# Altium PCB PCB_Rev1.PcbDoc
Units mm, origin at the board's own origin, x right, y up, seen from the top; angles counter-clockwise.
Board outline 85.6 x 54.5 mm, 2 copper layers (Top Layer, Bottom Layer); 83 components, 68 nets, 281 pads, 4 vias.
Unrouted connection lines stored in the file: 182.
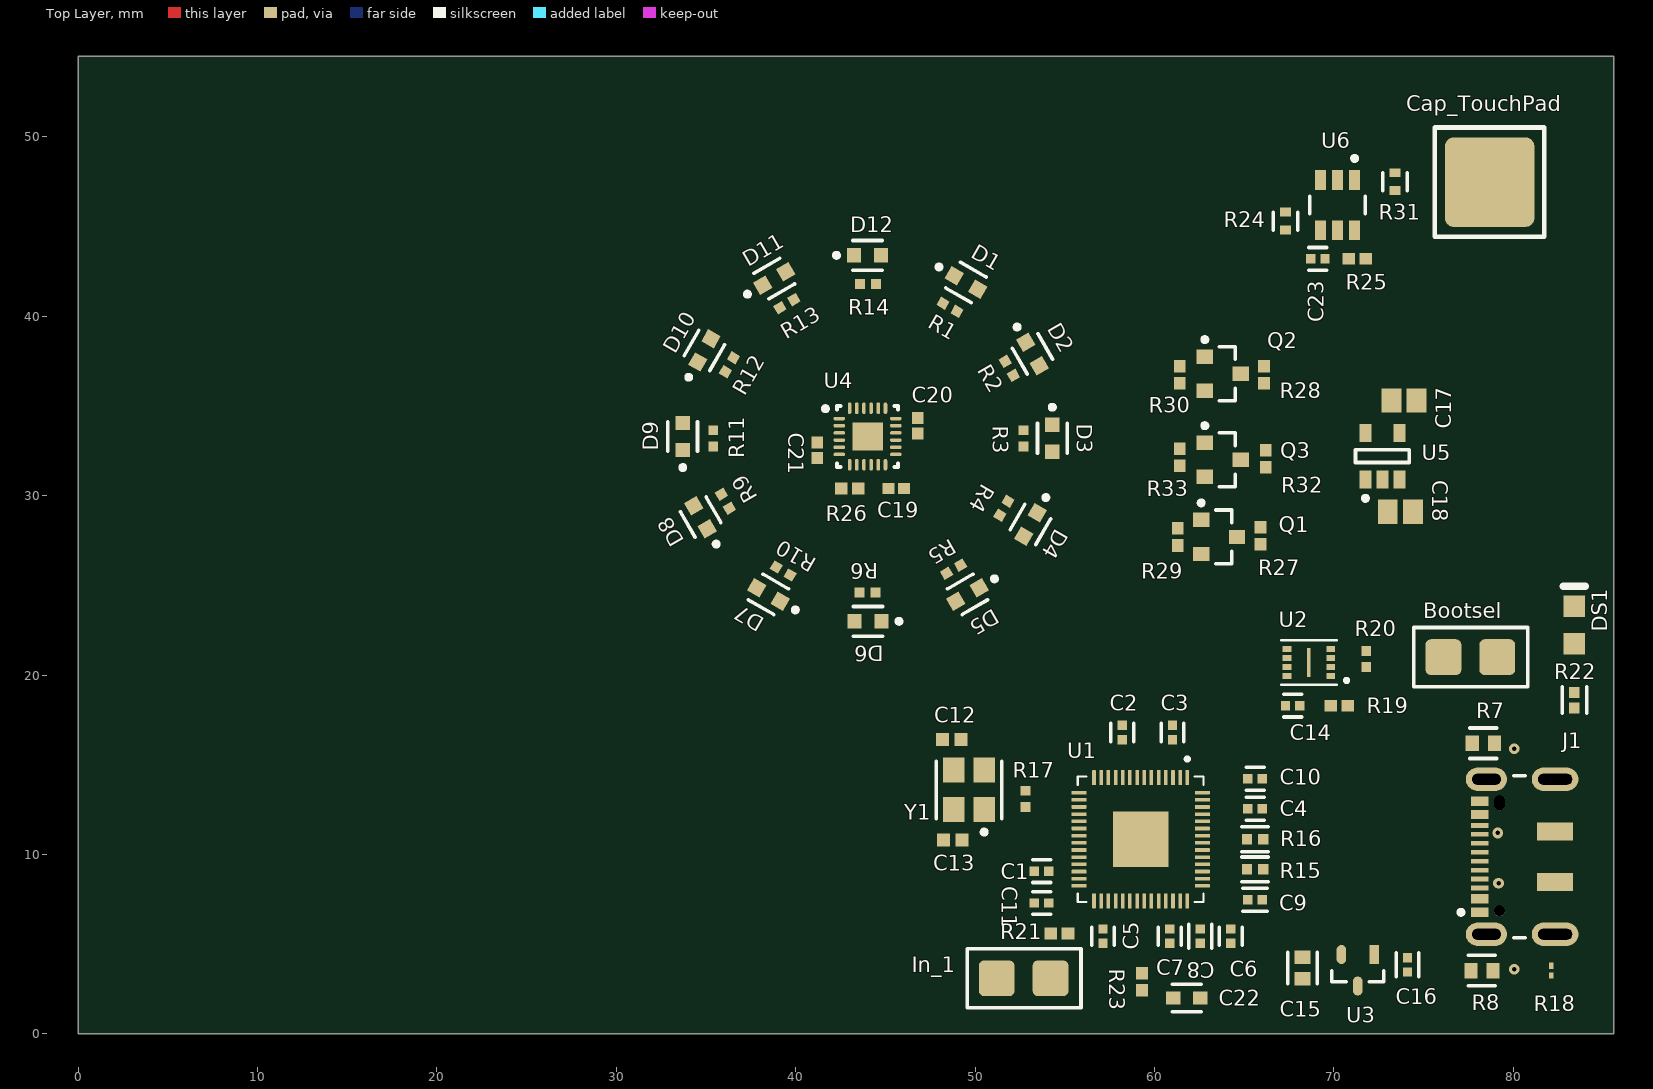
[diagram p0: Top Layer view]
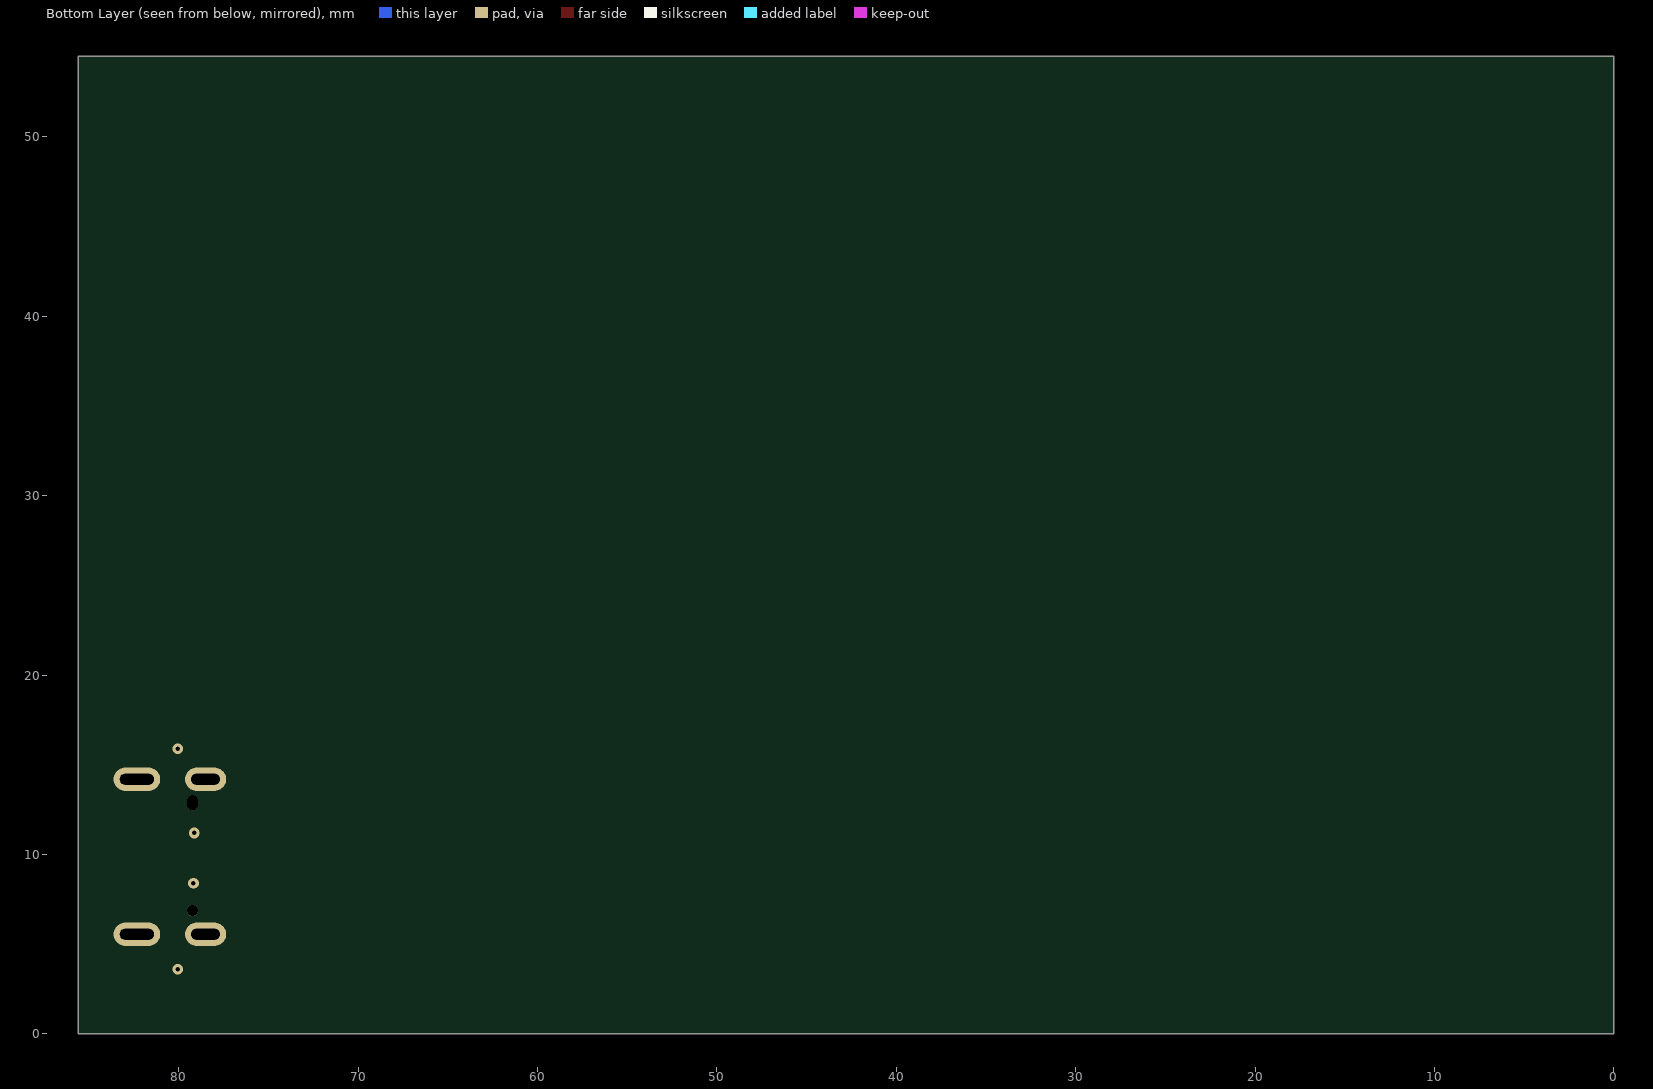
[diagram p1: Bottom Layer view, seen from below]

## Layer stack, top to bottom
Top Solder: solder mask 0.0102, Solder Resist, Dk 3.5
Top Layer: signal copper 0.0356
Dielectric 1: dielectric 0.32, FR-4, Dk 4.8
Bottom Layer: signal copper 0.0356
Bottom Solder: solder mask 0.0102, Solder Resist, Dk 3.5

## Board outline
0,0 0,54.5 85.6,54.5 85.6,0

## Design rules (kind name [scope] priority, off if disabled: settings)
Clearance [All] p1: gap=0.15 ignorepadtopadclearanceinfootprint=FALSE except(0: Arc-Hole Track-Hole SMDPad-Hole THPad-Hole Via-Hole Fill-Hole Poly-Hole Region-Hole Text-Hole)
DiffPairsRouting [All] p1: maxlimit=0.15 minlimit=0.15 mostfreqgap=0.15 toplayer_minwidth=0.1 toplayer_maxwidth=0.8 toplayer_prefwidth=0.8 bottomlayer_minwidth=0.1 bottomlayer_maxwidth=0.8 bottomlayer_prefwidth=0.8 maxuncoupledlength=12.7
PolygonConnect [All] p1: connectstyle=Relief reliefconductorwidth=0.254 reliefentries=4 polygonreliefangle="90 Angle" airgapwidth=0.254
RoutingVias [All] p1: holewidth=0.2 width=0.4 viastyle="Through Hole" minholewidth=0.2 minwidth=0.3 maxholewidth=0.6 maxwidth=6
SolderMaskExpansion [All] p1: expansion=0.102 istentingtop=FALSE
Width Width_PowerPorts [(InNet('1V1') OR InNet('1V8') OR InNet('3V3') OR InNet('5V_USB'))] p1: maxlimit=3 minlimit=0.2 preferedwidth=0.3 minimp=50.000000 maximp=50.000000 favimp=50.000000
Width [All] p2: maxlimit=3 minlimit=0.15 preferedwidth=0.18 minimp=50.000000 maximp=50.000000 favimp=50.000000
29 further rules are at their usual default settings.

## Classes and differential pairs
differential pair class 90ohm: USB_D
net class USB: USB_D_N USB_D_P
net class SPI_FLASH: QSPI_CSN QSPI_SCLK QSPI_SD0 QSPI_SD1 QSPI_SD2 QSPI_SD3
net class LEDS: LED_1 LED_2 LED_3 LED_4 LED_5 LED_6 LED_7 LED_8 LED_9 LED_10 LED_11 LED_12
net class I2C: SCL SDA
net class I2C_1V8: SCL_1V8 SDA_1V8
differential pair USB_D: +USB_D_P -USB_D_N

## Components (designator, comment, footprint, x,y, rotation, side; value= is the part's Value field where it differs from the comment)
Bootsel "2PinPad_1" 2PinPad_1 76.1,21 r0 top
C1 "100nF" FP-C0402-BB-MFG 53.7,9.075 r180 top value="0.10 μF"
C2 "100nF" FP-C0402-BB-MFG 58.2,16.8 r90 top value="0.10 μF"
C3 "100nF" FP-C0402-BB-MFG 61,16.8 r90 top value="0.10 μF"
C4 "100nF" FP-C0402-BB-MFG 65.6,12.55 r0 top value="0.10 μF"
C5 "100nF" FP-C0402-BB-MFG 57.125,5.45 r270 top value="0.10 μF"
C6 "100nF" FP-C0402-BB-MFG 64.25,5.45 r270 top value="0.10 μF"
C7 "100nF" FP-C0402-BB-MFG 60.85,5.45 r270 top value="0.10 μF"
C8 "1u" FP-C0402C105K8PACTU-MFG 62.55,5.45 r90 top
C9 "1u" FP-C0402C105K8PACTU-MFG 65.6,7.475 r0 top
C10 "100nF" FP-C0402-BB-MFG 65.6,14.225 r0 top value="0.10 μF"
C11 "100nF" FP-C0402-BB-MFG 53.7,7.3 r180 top value="0.10 μF"
C12 "10pF" CAPC1005X55X25ML05T05 48.7,16.4 r180 top
C13 "10pF" CAPC1005X55X25ML05T05 48.75,10.8 r0 top
C14 "100nF" FP-C0402-BB-MFG 67.7,18.3 r180 top value="0.10 μF"
C15 "2.2u" FP-C0603C225K4PACTU-MFG 68.25,3.675 r270 top
C16 "1u" FP-C0402C105K8PACTU-MFG 74.1,3.85 r270 top
C17 "1u" CAPC2013X140X50LL20T25 73.9,35.3 r0 top
C18 "1u" CAPC2013X140X50LL20T25 73.7,29.1 r0 top
C19 "0.1u" CAPC1005X55X30NL05T10 45.6,30.4 r180 top
C20 "0.1u" CAPC1005X55X30NL05T10 46.8,33.9 r270 top
C21 "0.1u" CAPC1005X55X30NL05T10 41.2,32.53 r270 top
C22 "100nF" FP-0603-L_1_6_0_15-W_0_81-MFG 61.8,2 r0 top
C23 "100nF" FP-C0402-BB-MFG 69.1,43.2 r180 top value="0.10 μF"
Cap_TouchPad "TouchPad" TouchPad 78.675,47.475 r90 top
D1 "LTST-C190KRKT" FP-LTST-C190KRKT-MFG 49.484,41.886 r330 top
D2 "Led_r" FP-LTST-C190KRKT-MFG 53.2,37.9 r300 top
D3 "Led_r" FP-LTST-C190KRKT-MFG 54.3,33.2 r270 top
D4 "Led_r" FP-LTST-C190KRKT-MFG 53.075,28.4 r240 top
D5 "Led_r" FP-LTST-C190KRKT-MFG 49.575,24.5 r210 top
D6 "Led_r" FP-LTST-C190KRKT-MFG 44.025,23 r180 top
D7 "LTST-C190KRKT" FP-LTST-C190KRKT-MFG 38.475,24.5 r150 top
D8 "Led_r" FP-LTST-C190KRKT-MFG 34.7,28.8 r120 top
D9 "Led_r" FP-LTST-C190KRKT-MFG 33.7,33.3 r90 top
D10 "Led_r" FP-LTST-C190KRKT-MFG 34.9,38.1 r60 top
D11 "Led_r" FP-LTST-C190KRKT-MFG 38.8,42.1 r30 top
D12 "Led_r" FP-LTST-C190KRKT-MFG 44,43.4 r0 top
DS1 "HSMG-C170" AVAG-HSMX-C170_V 83.4,22.8 r90 top
In_1 "2PinPad_1" 2PinPad_1 51.2,3.1 r0 top
J1 "DX07S016JA1R1500" FP-DX07S016JA1R1500-MFG 81.325,9.875 r90 top
Q1 "BSS138-7-F" DIOD-SOT23-3_V 63.6,27.7 r0 top
Q2 "BSS138-7-F" DIOD-SOT23-3_V 63.8,36.8 r0 top
Q3 "BSS138-7-F" DIOD-SOT23-3_V 63.8,32 r0 top
R1 "270R" RESC1005X40X25NL05T05 48.6,40.5 r330 top
R2 "270R" RESC1005X40X25NL05T05 51.9,37.1 r300 top
R3 "270R" RESC1005X40X25NL05T05 52.7,33.2 r270 top
R4 "270R" RESC1005X40X25NL05T05 51.6,29.3 r240 top
R5 "270R" RESC1005X40X25NL05T05 48.8,25.9 r210 top
R6 "270R" RESC1005X40X25NL05T05 44,24.6 r180 top
R7 "5.1K" FP-CRCW0603-e3-IPC_C 78.325,16.2 r0 top
R8 "5.1K" FP-CRCW0603-e3-IPC_C 78.25,3.525 r0 top
R9 "270R" RESC1005X40X25NL05T05 36.075,29.69 r120 top
R10 "270R" RESC1005X40X25NL05T05 39.3,25.8 r150 top
R11 "270R" RESC1005X40X25NL05T05 35.4,33.2 r90 top
R12 "270R" RESC1005X40X25NL05T05 36.3,37.3 r60 top
R13 "270R" RESC1005X40X25NL05T05 39.5,40.7 r30 top
R14 "270R" RESC1005X40X25NL05T05 44.025,41.8 r0 top
R15 "27" FP-ERJ2R-IPC_B 65.6,9.175 r180 top
R16 "27" FP-ERJ2R-IPC_B 65.6,10.85 r180 top
R17 "1k" RESC1005X40X25NL05T05 52.8,13.1 r270 top
R18 "1M" RESC0603X26X15LL03T05 82.1,3.525 r90 top
R19 "10kR" RESC1005X40X25ML05T10 70.3,18.3 r180 top
R20 "1k" RESC1005X40X25NL05T05 71.8,20.9 r90 top
R21 "10kR" RESC1005X40X25ML05T10 54.7,5.6 r0 top
R22 "330R" FP-RC1005-IPC_B 83.4,18.6 r270 top
R23 "10kR" RESC1005X40X25ML05T10 59.3,2.9 r90 top
R24 "4.7k" FP-AC0402-MFG 67.3,45.3 r90 top
R25 "10kR" RESC1005X40X25ML05T10 71.3,43.2 r180 top
R26 "10kR" RESC1005X40X25ML05T10 43,30.4 r180 top
R27 "10kR" RESC1005X40X25ML05T10 65.9,27.775 r270 top
R28 "10kR" RESC1005X40X25ML05T10 66.1,36.75 r90 top
R29 "10kR" RESC1005X40X25ML05T10 61.3,27.7 r90 top
R30 "10kR" RESC1005X40X25ML05T10 61.4,36.75 r90 top
R31 "4.7k" FP-AC0402-MFG 73.4,47.5 r90 top
R32 "10kR" RESC1005X40X25ML05T10 66.2,32.05 r90 top
R33 "10kR" RESC1005X40X25ML05T10 61.4,32.15 r90 top
U1 "RP2040" QFN40P700X700X90-57N 59.225,10.85 r270 top
U2 "W25Q16JVUXIQ_TR" PSON50P300X200X60-9N 68.6,20.7 r180 top
U3 "AP2210N-3.3TRG1" FP-SOT23-IPC_C 71.325,3.55 r270 top
U4 "ICM-20948" TDK-QFN-24_L 44,33.3 r0 top
U5 "MIC5504-1.8YM5-TR" FP-SOT23-5LD-PL-1-MFG 72.7,32.2 r90 top
U6 "MTCH101-I/OT" FP-C04-028-MFG 70.2,46.2 r270 top
Y1 "ABM8G-12.000MHZ-B4Y-T" FP-ABM8G-MFG 49.65,13.6 r90 top

## Footprints (in the part's own frame and the unit in brackets; to place one, negate y for a bottom-side part, rotate by r counter-clockwise, add the part's x,y. Pads: shape width x height; smd on the part's side, far side on the other; paste and mask are expansions set on the pad)
2PinPad_1 [mm]
  rrect30% 2x2 smd: 1(0,0) 2(3,0)
  silkscreen extent -1.65,-1.65 4.7,1.65
AVAG-HSMX-C170_V [mm] "SMD, 2-Leads, Body 2x1.25mm, Height 0.8mm"
  rect 1.2x1.2 smd: 1(-1.05,0) 2(1.05,0)
  silkscreen extent 2.15,-0.63 2.15,0.63, body extent -1,-0.63 1,0.63, height 0.8
CAPC1005X55X25ML05T05 [mm] "Chip Capacitor, 2-Leads, Body 1.00x0.50mm, IPC Low Density"
  rect 0.72x0.72 smd: 1(-0.51,0) 2(0.51,0)
  body extent -0.53,-0.28 0.53,0.27, height 0.55
CAPC1005X55X30NL05T10 [mm] "Chip Capacitor, 2-Leads, Body 1.00x0.50mm, IPC Medium Density"
  rect 0.66x0.62 smd: 1(-0.43,0) 2(0.43,0)
  body extent -0.53,-0.28 0.53,0.27, height 0.55
CAPC2013X140X50LL20T25 [mm] "Chip Capacitor, 2-Leads, Body 2.00x1.25mm, IPC High Density"
  rect 1.1x1.35 smd: 1(-0.7,0) 2(0.7,0)
  body extent -1.1,-0.72 1.1,0.72, height 1.4
DIOD-SOT23-3_V [mm] "SOT23, 3-Leads, Body 3x1.4mm, Pitch 0.95mm"
  rect 0.9x0.8 smd: 1(-1,0.95) 2(-1,-0.95) 3(1,0)
  silkscreen extent -1.12,-1.5 0.7,2.02, body extent -1.25,-1.5 1.25,1.5, height 1.1
FP-0603-L_1_6_0_15-W_0_81-MFG [mm]
  rect 0.8x0.75 smd paste+0 mask+0: 1(-0.75,0) 2(0.75,0)
  silkscreen extent -0.8,-0.77 0.8,0.77, body extent -1.25,-0.58 1.25,0.58, height 0.25
FP-ABM8G-MFG [mm]
  rect 1.4x1.2 smd paste+0 mask+0: 1(-1.1,-0.85) 2(1.1,-0.85) 3(1.1,0.85) 4(-1.1,0.85)
  silkscreen extent -2.47,-1.83 1.6,1.83, body extent -1.9,-1.55 1.9,1.55, height 0.25
FP-AC0402-MFG [mm]
  rect 0.5x0.6 smd paste+0 mask+0: 1(-0.5,0) 2(0.5,0)
  silkscreen extent -0.5,-0.67 0.5,0.67, body extent -0.85,-0.4 0.85,0.4, height 0.25
FP-C04-028-MFG [mm]
  rect 1.1x0.6 smd paste+0 mask+0: 1(-1.4,0.95) 2(-1.4,0) 3(-1.4,-0.95) 4(1.4,-0.95) 5(1.4,0) 6(1.4,0.95)
  silkscreen extent -2.72,-1.55 0.48,1.55, body extent -2.05,-1.78 2.05,1.78, height 0.25
FP-C0402-BB-MFG [mm]
  rect 0.52x0.52 smd paste+0 mask+0: 1(-0.4,0) 2(0.4,0)
  silkscreen extent -0.5,-0.64 0.5,0.64, body extent -0.8,-0.4 0.8,0.4, height 0.25
FP-C0402C105K8PACTU-MFG [mm]
  rect 0.52x0.52 smd paste+0 mask+0: 1(-0.4,0) 2(0.4,0)
  silkscreen extent -0.67,-0.64 0.67,0.64, body extent -0.8,-0.4 0.8,0.4, height 0.25
FP-C0603C225K4PACTU-MFG [mm]
  rect 0.75x0.9 smd paste+0 mask+0: 1(-0.6,0) 2(0.6,0)
  silkscreen extent -0.87,-0.82 0.87,0.82, body extent -1.2,-0.6 1.2,0.6, height 0.25
FP-CRCW0603-e3-IPC_C [mm]
  rect 0.735x0.862 smd paste+0 mask+0: 1(-0.615,0) 2(0.615,0)
  silkscreen extent -0.75,-0.85 0.75,0.85, body extent -1.08,-0.58 1.08,0.58, height 0.25
FP-DX07S016JA1R1500-MFG [mm]
  rrect100% 1.3x2.3 hole 1.6 slot 0.6 at 0 deg paste-1000 mask+0: 1(-4.32,2.825) 2(4.32,2.825)
  rrect100% 1.3x2.6 hole 1.9 slot 0.6 at 0 deg paste-1000 mask+0: 3(-4.32,-1) 6(4.32,-1)
  rect 1x2 smd paste+0 mask+0: 4(-1.4,-1) 5(1.4,-1)
  rect 0.52x1 smd paste+0 mask+0: A1/B12(-3.1,3.2) A4/B9(-2.35,3.2) A12/B1(3.1,3.2) B4/A9(2.35,3.2)
  rect 0.27x1 smd paste+0 mask+0: A5(-1.75,3.2) A6(-0.25,3.2) A7(0.75,3.2) A8(1.75,3.2) B5(1.25,3.2) B6(0.25,3.2) B7(-0.75,3.2) B8(-1.25,3.2)
  round 0.6 hole 0.6 unplated paste-1000 mask+0: ""(-3,2.1)
  rrect100% 0.85x0.6 hole 0.6 slot 0.85 at 0 deg unplated paste-1000 mask+0: ""(3,2.1)
  silkscreen extent -4.52,0.67 4.52,4.37, body extent -5.07,-3.75 5.07,4.08, height 0.25
FP-ERJ2R-IPC_B [mm]
  rect 0.568x0.572 smd paste+0 mask+0: 1(-0.452,0) 2(0.452,0)
  silkscreen extent -0.74,-0.69 0.74,0.69, body extent -0.89,-0.44 0.89,0.44, height 0.25
FP-LTST-C190KRKT-MFG [mm]
  rect 0.8x0.8 smd paste+0 mask+0: 1(-0.75,0) 2(0.75,0)
  silkscreen extent -1.85,-0.82 0.82,0.82, body extent -1.25,-0.55 1.25,0.55, height 0.25
FP-RC1005-IPC_B [mm]
  rect 0.615x0.572 smd paste+0 mask+0: 1(-0.429,0) 2(0.429,0)
  silkscreen extent -0.74,-0.69 0.74,0.69, body extent -0.89,-0.44 0.89,0.44, height 0.25
FP-SOT23-5LD-PL-1-MFG [mm]
  rect 1x0.66 smd paste+0 mask+0: 1(-1.3,0.95) 2(-1.3,0) 3(-1.3,-0.95) 4(1.3,-0.95) 5(1.3,0.95)
  silkscreen extent -2.47,-1.5 0.35,1.5, body extent -1.9,-1.6 1.9,1.6, height 0.25
FP-SOT23-IPC_C [mm]
  rect 1.059x0.547 smd paste+0 mask+0: 1(-0.877,0.915)
  rrect100% 1.059x0.547 smd paste+0 mask+0: 2(-0.877,-0.915) 3(0.877,0)
  silkscreen extent 0.03,-1.45 0.65,1.45, body extent -1.51,-1.55 1.51,1.55, height 0.25
PSON50P300X200X60-9N [mm]
  rect 0.49x0.35 smd: 1(-1.22,0.75) 2(-1.22,0.25) 3(-1.22,-0.25) 4(-1.22,-0.75) 5(1.22,-0.75) 6(1.22,-0.25) 7(1.22,0.25) 8(1.22,0.75)
  rect 0.2x1.6 smd: 9(0,0)
  silkscreen extent -2.2,-1.24 1.55,1.24, body extent -1.5,-1 1.5,1, height 0.6
QFN40P700X700X90-57N [mm]
  rrect25% 0.84x0.2 smd: 1(-3.435,2.6) 2(-3.435,2.2) 3(-3.435,1.8) 4(-3.435,1.4) 5(-3.435,1) 6(-3.435,0.6) 7(-3.435,0.2) 8(-3.435,-0.2) 9(-3.435,-0.6) 10(-3.435,-1) 11(-3.435,-1.4) 12(-3.435,-1.8) 13(-3.435,-2.2) 14(-3.435,-2.6) 29(3.435,-2.6) 30(3.435,-2.2) 31(3.435,-1.8) 32(3.435,-1.4) 33(3.435,-1) 34(3.435,-0.6) 35(3.435,-0.2) 36(3.435,0.2) 37(3.435,0.6) 38(3.435,1) 39(3.435,1.4) 40(3.435,1.8) 41(3.435,2.2) 42(3.435,2.6)
  rrect25% 0.2x0.84 smd: 15(-2.6,-3.435) 16(-2.2,-3.435) 17(-1.8,-3.435) 18(-1.4,-3.435) 19(-1,-3.435) 20(-0.6,-3.435) 21(-0.2,-3.435) 22(0.2,-3.435) 23(0.6,-3.435) 24(1,-3.435) 25(1.4,-3.435) 26(1.8,-3.435) 27(2.2,-3.435) 28(2.6,-3.435) 43(2.6,3.435) 44(2.2,3.435) 45(1.8,3.435) 46(1.4,3.435) 47(1,3.435) 48(0.6,3.435) 49(0.2,3.435) 50(-0.2,3.435) 51(-0.6,3.435) 52(-1,3.435) 53(-1.4,3.435) 54(-1.8,3.435) 55(-2.2,3.435) 56(-2.6,3.435)
  rect 3.1x3.1 smd paste-0.57: 57(0,0)
  silkscreen extent -4.57,-3.5 3.5,3.5, body extent -3.5,-3.5 3.5,3.5, height 0.9
RESC0603X26X15LL03T05 [mm] "Chip Resistor, 2-Leads, Body 0.60x0.30mm, IPC High Density"
  rect 0.35x0.25 smd: 1(-0.275,0) 2(0.275,0)
  body extent -0.32,-0.16 0.31,0.17, height 0.26
RESC1005X40X25ML05T10 [mm] "Chip Resistor, 2-Leads, Body 1.00x0.50mm, IPC Low Density"
  rect 0.7x0.65 smd: 1(-0.475,0) 2(0.475,0)
  body extent -0.53,-0.27 0.53,0.28, height 0.4
RESC1005X40X25NL05T05 [mm] "Chip Resistor, 2-Leads, Body 1.00x0.50mm, IPC Medium Density"
  rect 0.55x0.55 smd: 1(-0.45,0) 2(0.45,0)
  body extent -0.53,-0.27 0.52,0.28, height 0.4
TDK-QFN-24_L [mm] "QFN, 24-Leads, Body 3.10x3.10mm, Pitch 0.40mm, Thermal Pad 1.70x1.54mm, IPC High Density"
  oval 0.65x0.2 smd: 1(-1.575,1) 2(-1.575,0.6) 3(-1.575,0.2) 4(-1.575,-0.2) 5(-1.575,-0.6) 6(-1.575,-1) 13(1.575,-1) 14(1.575,-0.6) 15(1.575,-0.2) 16(1.575,0.2) 17(1.575,0.6) 18(1.575,1)
  oval 0.2x0.65 smd: 7(-1,-1.575) 8(-0.6,-1.575) 9(-0.2,-1.575) 10(0.2,-1.575) 11(0.6,-1.575) 12(1,-1.575) 19(1,1.575) 20(0.6,1.575) 21(0.2,1.575) 22(-0.2,1.575) 23(-0.6,1.575) 24(-1,1.575)
  rect 1.7x1.54 smd: 25(0,0)
  silkscreen extent -2.47,-1.7 1.7,1.7, body extent -1.55,-1.55 1.55,1.55, height 1.05
TouchPad [mm]
  rrect20% 5x5 smd: 1(0,0)
  silkscreen extent -3.05,-3.05 3.05,3.05

## Part data
C1 C2 C3 C4 C5 C6 C7 C10 C11 C14 C23: library part CMP-2008-02108-2, "CAP CER 0.1UF 16V X7R 0402", Capacitance="0.10 μF", Manufacturer=Kemet, Manufacturer Part Number=C0402C104K4RACTU, Package=C0402-BB, Temperature="-55°C to +125°C", Temperature Characteristic=X7R, Temperature Coefficient=15%, Temperature Range High=+125°C, Temperature Range Low=-55°C, Tolerance=0.1, Voltage Rating="16 V", Automotive=No, Category=Cap, ComponentLink2Description=Datasheet, ComponentLink2URL=https://content.kemet.com/datasheets/KEM_C1002_X7R_SMD.pdf, Device Class L1="Passive Components", Device Class L2=Capacitors, Device Class L3="Ceramic Capacitors", Digikey Description="CAP CER 0.1UF 16V X7R 0402", Height=0.55mm, Ipc Land Pattern Name=CAPC10050X50, Lead Free=Yes, Material=Ceramic, Mouser Description="Cap Ceramic 0.1uF 16V X7R 10% SMD 0402 125?C Paper T/R - Tape and Reel (Alt: C0402C104K4RAC TU)", Octopart=https://octopart.com/c0402c104k4ractu-kemet-94158, RoHS=TRUE
C8 C9 C16: library part CMP-2008-02081-2, "CAP CER 1UF 10V X5R 0402", Capacitance=1uF, Case Code (Imperial)=0402, Case Code (Metric)=1005, Dielectric=X5R, Dielectric Material=Ceramic, Max Operating Temperature=85°C, Min Operating Temperature=-55°C, Package Quantity=1, Tolerance=10%, Voltage=10V, Case/Package=0402, Construction=Flat, Contact Plating=Tin, Depth=0.5mm, Dissipation Factor=5%, Height=0.5mm, Lead Free="Lead Free", Length=1mm, Mount="Surface Mount", Number of Pins=2, Packaging="Tape and Reel", Radiation Hardening=No, REACH SVHC="No SVHC", RoHS Compliant=Yes, Series=C, Termination=SMD/SMT, Thickness=0.022inch, Voltage Rating=10V, Voltage Rating (DC)=10V, Width=0.5mm
C12 C13: library part CMP-2100-03589-1, "Chip Capacitor, 10 pF, +/- 5%, 50 V, -55 to 125 degC, 0402 (1005 Metric), RoHS, Tape and Reel", Case Code (Imperial)=0402, Case Code (Metric)=1005, Dielectric=C0G, Dielectric Material=Ceramic, Insulation Resistance=100GR, Manufacturer=Yageo, Max Operating Temperature=125degC, Min Operating Temperature=-55degC, Package Description="2-Pin Surface Mount Device, Body 1 x 0.5 mm", Package Quantity=1, Temperature Coefficient=30ppm/degC, Tolerance=5%, Voltage=50V, Capacitance=10pF, Case/Package=0402, Composition=Ceramic, Datasheet URL=http://www.yageo.com/documents/recent/UPY-GP_NP0_16V-to-50V_14.pdf, Datasheet Version="Rev. 14, 07/2016", Depth=0.5mm, Height=0.5mm, Lead Free=LeadFree, Length=1mm, Manufacturer URL=http://www.yageo.com/, Mount=SurfaceMount, Number of Pins=2, Package Reference=0402, Packaging=TapeandReel, Radiation Hardening=No, REACH SVHC=NoSVHC, RoHSCompliant=True, Termination=SMD/SMT, Thickness=0.022inch, Voltage Rating=50V, Voltage Rating (DC)=50V, Width=0.02inch
C15: library part CMP-2006-02259-2, "CAP CER 2.2UF 16V X5R 0603", Capacitance=2.2uF, Case Code (Imperial)=0603, Case Code (Metric)=1608, Dielectric=X5R, Dielectric Material=Ceramic, Max Operating Temperature=85°C, Min Operating Temperature=-55°C, Package Quantity=1, Tolerance=10%, Voltage=16V, Case/Package=0603, Construction=Flat, Contact Plating=Tin, Depth=0.8mm, Dissipation Factor=5%, Height=0.8mm, Lead Free="Lead Free", Length=1.6mm, Mount="Surface Mount", Number of Pins=2, Packaging="Tape and Reel", Radiation Hardening=No, REACH SVHC="No SVHC", RoHS Compliant=Yes, Series=C, Termination=SMD/SMT, Thickness=0.034inch, Voltage Rating=16V, Voltage Rating (DC)=16V, Width=0.8mm
C17 C18: library part CMP-1036-04737-2, Manufacturer=Kemet, Part Number=C0805C105J8RACTU
C19 C20 C21: library part CMP-2008-03087-1, Manufacturer=Kemet, Part Number=C0402C104K9RACTU
C22: library part CMP-2006-02049-2, "General Purpose Ceramic Capacitor, 0603, 100nF, 5%, X7R, 15%, 50V", Case Code (Imperial)=0603, Case Code (Metric)=1608, Dielectric=X7R, Dielectric Material=Ceramic, Max Operating Temperature=125°C, Min Operating Temperature=-55°C, Package Quantity=1, Tolerance=5%, Voltage=50V, Capacitance=100nF, Case/Package=0603, Construction=Flat, Contact Plating=Tin, Depth=0.81mm, Height=0.9mm, Lead Free="Lead Free", Length=1.6mm, Mount="Surface Mount", Number of Pins=2, Packaging="Tape and Reel", Radiation Hardening=No, REACH SVHC="No SVHC", RoHS Compliant=Yes, Series=-, Termination=SMD/SMT, Thickness=0.035inch, Voltage Rating=50V, Voltage Rating (DC)=50V, Width=0.032inch
D1 D2 D3 D4 D5 D6 D7 D8 D9 D10 D11 D12: library part CMP-1674-00011-2, "LED RED CLEAR CHIP SMD", Case Code (Imperial)=0603, Case Code (Metric)=1608, Color=Red, Forward Current=30mA, Forward Voltage=2.4V, Lens Color=Colorless, Max Operating Temperature=85°C, Min Operating Temperature=-55°C, Package Quantity=1, Power Dissipation=75mW, Reverse Voltage=5V, Test Current=20mA, Case/Package=0603, Depth=0.8mm, Dominant Wavelength=631nm, Height=0.8mm, Illumination Color=Red, Lead Free="Lead Free", Length=1.6mm, Lens Style=Diffused, Lens Transparency=Clear, Luminous Intensity=54mcd, Mount="Surface Mount", Number of Elements=1, Number of LEDs=1, Number of Pins=2, Packaging="Tape and Reel", Power Rating=75mW, Radiation Hardening=No, Viewing Angle=130°, Wavelength=639nm, Width=0.8mm
DS1: library part CMP-2000-05062-1, "Chip LED, Green, 2.2 V, -40 to 85 degC, 2-Pin SMD, Pb-Free, Tape and Reel", Forward Current If=20mA, Forward Voltage=2.2V, Forward Voltage VF Max=2.6V, LED Colour=Green, Manufacturer=Avago, Operating Temperature Max=85degC, Operating Temperature Min=-30degC, Operating Temperature Range=-30degCto+85degC, Opto Case Style=SMD, Package Description="2-Pin Surface Mount Device, Body 2 x 1.25 mm, Height 0.8 mm", Package Reference=HSMX-C170, Storage Temperature Min=-40degC, Bulb Size=1.25mmx1.4mm, Datasheet URL=https://datasheet.ciiva.com/29280/180495-da-01-en-chip-led-hsmg-c170-gelb-gruen-29280971.pdf, Datasheet Version=Oct-08, Dominant Wavelength=572nm, Dominant Wavelength Typ=572nm, External Depth=0.8mm, External Length / Height=2mm, External Width=1.25mm, Forward Current If Max=20mA, LED Mounting=SMD, LED Type=Standard, Lens Shape=Rectangular, Light Area Height=1mm, Luminous Intensity=15mcd, Luminous Intensity Min=4mcd, Luminous Intensity Typ=15mcd, Manufacturer URL=http://www.avagotech.com/, Mounting Type=SMD, MSL=MSL2A-4weeks, No. of Pins=2, Opto Mounting Orientation=Top, Packaging=CutTape, Peak Forward Current=20mA, Peak Wavelength=570nm, PIV Max=5V, Storage Temperature Max=85degC, SVHC=NoSVHC(16-Jun-2014), Viewing Angle=170deg, Voltage Vf Typ=2.2V, Wavelength Typ=570nm
J1: library part CMP-19038-000003-1, "CONN RCP USB2.0 TYP C 24P SMD RA"
Q1 Q2 Q3: library part CMP-2000-04930-1, "N-Channel Enhancement Mode Mosfet, 50 V, 0.2 A, -55 to 150 degC, 3-Pin SOT23, RoHS, Tape and Reel", Id - Continuous Drain Current=200mA, Manufacturer="Diodes Inc", Maximum Operating Temperature=+150C, Minimum Operating Temperature=-55C, Package / Case=SOT-23-3, Package Description="3-Pin Small Outline Transistor, Body 2.9 x 1.3 mm, Pitch 0.96 mm", Package Reference=SOT23-3, Pd - Power Dissipation=300mW, Rds On - Drain-Source Resistance=3.5Ohms, Vds - Drain-Source Breakdown Voltage=50V, Vgs - Gate-Source Voltage=20V, Brand=DiodesIncorporated, Channel Mode=Enhancement, Configuration=Single, Datasheet URL=https://datasheet.ciiva.com/8115/ds30144-8115344.pdf, Datasheet Version="Rev. 20-2, 11/2013", Factory Pack Quantity=3000, Height=1mm, Length=2.9mm, Manufacturer URL=http://www.diodes.com/, Mounting Style=SMD/SMT, Number of Channels=1Channel, Packaging=Reel, Product=MOSFETSmallSignal, Product Category=MOSFET, RoHS=True, Series=BSS138, Technology=Si, Transistor Polarity=N-Channel, Transistor Type=1N-Channel, Typical Turn-Off Delay Time=20ns, Typical Turn-On Delay Time=20ns, Unit Weight=0.000282oz, Width=1.3mm
R1 R2 R3 R4 R5 R6 R9 R10 R11 R12 R13 R14: library part CMP-1011-00444-2, Manufacturer=Panasonic, Part Number=ERJ2RKF2700X
R7 R8: library part CMP-1012-00590-3, "RES Thick Film, 5.1kΩ, 1%, 0.1W, 100ppm/°C, 0603", Case Code (Imperial)=0603, Case Code (Metric)=1608, Max Operating Temperature=155°C, Min Operating Temperature=-55°C, Package Quantity=5000, Power Rating=100mW, Resistance=5.1kR, Temperature Coefficient=100ppm/°C, Tolerance=1%, Voltage Rating=75V, Case/Package=0603, Composition="Thick Film", Contact Plating=Tin, Depth=0.85mm, Height=0.45mm, Lead Free="Lead Free", Length=1.55mm, Military Standard=Not, Mount="Surface Mount", Packaging="Tape and Reel", Radiation Hardening=No, Termination=SMD/SMT, Voltage Rating (DC)=75V, Weight=7.1E-05oz, Width=0.85mm
R15 R16: library part CMP-2002-00830-2, "RES SMD 27 OHM 1% 1/10W 0402", Case Code (Imperial)=0402, Case Code (Metric)=1005, Max Operating Temperature=155°C, Max Power Dissipation=100mW, Min Operating Temperature=-55°C, Package Quantity=1, Resistance=27R, Resistance Tolerance=1%, Resistor Type="Thick Film", Temperature Coefficient=100ppm/°C, Voltage Rating=50V, Case/Package=0402, Construction=Rectangular, Contact Plating=Tin, Depth=0.5mm, Features="Automotive AEC-Q200", Height=0.35mm, Lead Free="Lead Free", Length=1mm, Military Standard=Not, Mount="Surface Mount", Number of Pins=2, Number of Terminations=2, Packaging="Tape and Reel", Power Rating=100mW, Radiation Hardening=No, REACH SVHC="No SVHC", RoHS Compliant=Yes, Series=ERJ, Technology="THICK FILM", Termination=SMD/SMT, Tolerance=1%, Voltage Rating (DC)=50V, Weight=2.8E-05oz, Width=0.5mm
R17 R20: library part CMP-1011-00510-4, "Chip Resistor, 1 KOhm, +/- 1%, 100 mW, -55 to 155 degC, 0402 (1005 Metric), RoHS, Tape and Reel", Case Code (Imperial)=0402, Case Code (Metric)=1005, Manufacturer="Basic Passives", Max Operating Temperature="155 degC", Min Operating Temperature="-55 degC", Package Quantity=10000, PartNumber=ERJ-2RKF1001X, Power Rating="100 mW", Resistance="1 KOhm", Tolerance=1%, Voltage Rating="50 V", Case\/Package=0402, ComponentLink1Description="Manufacturer URL", ComponentLink1URL=http://www.panasonic.com/, ComponentLink2Description=Datasheet, ComponentLink2URL=http://industrial.panasonic.com/cdbs/www-data/pdf/RDA0000/AOA0000C86.pdf, DatasheetVersion=04/2015, Height="0.35 mm", Length="1 mm", Mount="Surface Mount", Mounting Technology="Surface Mount", PackageDescription="2-Pin Surface Mount Device, Body 1 x 0.5 mm", PackageReference=0402, Packaging="Tape and Reel", Pins=2, Radiation Hardening=No, REACH SVHC=Yes, RoHSCompliant=true, Width="0.5 mm"
R18: library part CMP-2004-03447-1, Manufacturer=Panasonic, Part Number=ERJ1GNF1004C
R19 R21 R23 R25 R26 R27 R28 R29 R30 R32 R33: library part CMP-2002-03043-1, Manufacturer="Vishay Dale", Part Number=CRCW040210K0FKEDHP
R22: library part CMP-13261-004965-1, "Res Thick Film 0402 330Ω 1% 0.063W ±100ppm/°C Molded SMD T/R", Case Code (Imperial)=0402, Case Code (Metric)=1005, Max Operating Temperature=155°C, Max Power Dissipation=63mW, Min Operating Temperature=-55°C, Package Quantity=1, Temperature Coefficient=100ppm/°C, Tolerance=1%, Case/Package=0402, Composition="Thick Film", Contact Plating=Tin, Depth=0.5mm, Features="Moisture Resistant", Height=0.016inch, Length=0.039inch, Military Standard=Not, Number of Terminations=2, Packaging="Tape and Reel", Power Rating=63mW, Radiation Hardening=No, Resistance=330R, Width=0.02inch
R24 R31: library part CMP-2002-01824-3, "RES 4.7kΩ ±1% 0.063W 0402", Case Code (Imperial)=0402, Case Code (Metric)=1005, Max Operating Temperature=155°C, Max Power Dissipation=63mW, Min Operating Temperature=-55°C, Power Rating=62.5mW, Resistance=4.7kR, Resistor Type="Thick Film", Temperature Coefficient=100ppm/°C, Tolerance=1%, Voltage Rating=50V, Case/Package=0402, Features="Moisture Resistant", Height=0.015inch, Lead Free="Lead Free", Length=0.039inch, Number of Terminations=2, Packaging="Tape and Reel", RoHS Compliant=Yes, Series=AC, Size Code=0402, Termination=SMD/SMT, Weight=2.3E-05oz, Width=0.5mm
U1 U2: Package=None, Availability=Unavailable, Price=None
  U1: MF="{'manufacturer': u'Raspberry Pi'}", MP=RP2040
  U2: MF="{'manufacturer': u'Winbond'}", MP="W25Q16JVUXIQ TR"
U3: library part CMP-12756-000036-1, "IC REG LINEAR 3.3V 300MA SOT23-3", Case/Package=SOT-23-3, Dropout Voltage=250mV, Max Input Voltage=13.2V, Max Operating Temperature=125°C, Max Output Current=300mA, Min Input Voltage=2.5V, Min Operating Temperature=-40°C, Output Voltage=3.3V, Package Quantity=3000, Power Supply Rejection Ratio (PSRR)=75dB, Quiescent Current=150uA, Accuracy=1%, Height=1.3mm, Length=3.02mm, Mount="Surface Mount", Number of Outputs=1, Number of Pins=3, Number of Regulators=1, Output Current=300mA, Output Type=Fixed, Packaging="Tape and Reel", Polarity=Positive, Weight=0.000282oz, Width=1.7mm
U4: library part CMP-2000-07532-1, "World’s Lowest Power 9-Axis MEMS MotionTracking(TM) Device, 1.71 to 3.6 V, -40 to 85 degC, 24-Pin QFN, RoHS, Tape and Reel", Manufacturer=TDK, Package Description="24-Pin Quad Flat No-lead Package, Body 3 x 3 mm, Pitch 0.4 mm", Package Reference=QFN-24, Datasheet URL=https://www.invensense.com/wp-content/uploads/2016/06/DS-000189-ICM-20948-v1.3.pdf, Datasheet Version="Rev. 1.3, 06/2017", Manufacturer URL=http://www.tdk.com/, Mounting Technology=SurfaceMount
U5: library part CMP-06324-000021-1, "IC REG LINEAR 1.8V 300MA SOT23-5", Dropout Voltage=160mV, Manufacturer=Microchip, Max Junction Temp=+125°C, Max Supply Voltage=5.5V, Min Supply Voltage=2.5V, Nominal Supply Current=38-42uA, Output Current=300mA, Output Voltage=1.8V, Package=SOT23-5LD-PL-1, Temperature="-40°C to +125°C", Temperature Range Low=-40°C, Accuracy Percentage=2%, Automotive=No, Category=IC, ComponentLink2Description=Datasheet, ComponentLink2URL=http://ww1.microchip.com/downloads/en/DeviceDoc/MIC5501-02-03-04-300mA-Single-Output-LDO-in-Small-Packages-DS20006006B.pdf, Device Class L1="Integrated Circuits (ICs)", Device Class L2="Power Management ICs", Device Class L3="Voltage Regulators - Linear", Digikey Description="IC REG LINEAR 1.8V 300MA SOT23-5", Height=1.45mm, Lead Free=Yes, Manufacturer Part Number=MIC5504-1.8YM5-TR, Number of Outputs=1, Octopart=https://octopart.com/mic5504-1.8ym5-tr-microchip-66803399, Output Type=Fixed, RoHS=TRUE, Standoff Height=0mm, Temperature Range High=+125°C
U6: library part CMP-06354-000003-1, "IC PROXIMITY DETECTOR SOT23-6", Case/Package=SOT-23, Max Operating Temperature=85°C, Max Output Current=25mA, Max Supply Voltage=5.5V, Min Operating Temperature=-40°C, Min Supply Voltage=2V, Nominal Supply Current=120uA, Operating Supply Current=340uA, Package Quantity=3000, Height=1.3mm, Length=3.1mm, Max Supply Current=25mA, Mount="Surface Mount", Number of Pins=6, Output Configuration=Digital, Packaging=Bulk, Radiation Hardening=No, REACH SVHC="No SVHC", RoHS Compliant=Yes, Sensing Method=Capacitive, Series=-, Supply Current=120uA, Width=1.8mm
Y1: library part CMP-27762-015546-1, "Crystal 12MHz ±30ppm (Tol) ±30ppm (Stability) 10pF FUND 120Ω 4-Pin SMD T/R", Case/Package=CSMD, ESR (Equivalent Series Resistance)=120R, Frequency=12MHz, Frequency Stability=30ppm, Load Capacitance=10pF, Max Operating Temperature=70°C, Min Operating Temperature=-20°C, Operating Frequency="12 MHz", Package Quantity=1000, Depth=2.5mm, Frequency Tolerance=30ppm, Height=1mm, Lead Free="Lead Free", Length=3.2mm, Mount="Surface Mount", Number of Pins=4, Packaging="Tape and Reel", Series=ABM8G, Termination=SMD/SMT, Tolerance=30ppm, Width=2.5mm

## Via types
v1: diameter 0.6, hole 0.254, Top Layer to Bottom Layer, 3 vias
v2: diameter 0.6, hole 0.26, Top Layer to Bottom Layer, 1 vias

## Nets (pads, with @x,y where several pads share a name; then routed paths per layer and width w, separated by ;. In a path a pad name is that pad's centre, name@x,y a point inside that pad or via, vN(x,y) a via of type N, cw(c..) or ccw(c..) an arc to the next point about the centre after c; other vN are vias at no path point)
1V1: C9.1 C10.1 C11.1 U1.23 U1.45 U1.50
1V8: C17.1 C20.2 C21.2 Q1.1 Q2.1 Q3.1 R26.2 R29.2 R30.2 R33.2 U4.8 U4.13 U4.22 U5.5
3V3: C1.1 C2.1 C3.1 C4.1 C5.1 C6.1 C7.1 C8.2 C14.1 C15.1 C18.1 C23.1 In_1.2 R19.2 R22.2 R25.2 R27.2 R28.2 R32.2 U1.1 U1.10 U1.22 U1.33 U1.42 U1.43 U1.44 U1.48 U1.49 U2.8 U3.2 U5.1 U5.3 U6.5
5V_USB: C16.2 J1.A4/B9 J1.B4/A9 U3.3
AD0_1V8: R26.1 U4.9
CC1: J1.A5 R8.2
  other v1: 80.05,3.6
  other v2: 79.175,8.4
CC2: J1.B5 R7.2
  other v1: 79.125,11.2 80.05,15.9
GND: Bootsel.2 C1.2 C2.2 C3.2 C4.2 C5.2 C6.2 C7.2 C8.1 C9.2 C10.2 C11.2 C12.1 C13.1 C14.2 C15.2 C16.1 C17.2 C18.2 C19.1 C20.1 C21.1 C22.2 C23.2 D1.1 D2.1 D3.1 D4.1 D5.1 D6.1 D7.1 D8.1 D9.1 D10.1 D11.1 D12.1 DS1.2 R7.1 R8.1 R18.1 R21.1 U1.57 U2.4 U3.1 U4.18 U5.2 U6.2 Y1.2 Y1.4
IMU_IMT_1V8: Q3.2 R33.1 U4.12
IMU_INT: Q3.3 R32.1 U1.35
IN_1: In_1.1 R21.2 U1.32
LED_1: R1.2 U1.5
LED_2: R2.2 U1.6
LED_3: R3.2 U1.7
LED_4: R4.2 U1.8
LED_5: R5.2 U1.9
LED_6: R6.2 U1.11
LED_7: R10.2 U1.12
LED_8: R9.2 U1.13
LED_9: R11.2 U1.14
LED_10: R12.2 U1.15
LED_11: R13.2 U1.16
LED_12: R14.2 U1.17
NetBootsel_1: Bootsel.1 R20.2
NetC12_2: C12.2 R17.1 Y1.3
NetC19_2: C19.2 U4.10
NetCap_TouchPad_1: Cap_TouchPad.1 R31.1
NetD1_2: D1.2 R1.1
NetD2_2: D2.2 R2.1
NetD3_2: D3.2 R3.1
NetD4_2: D4.2 R4.1
NetD5_2: D5.2 R5.1
NetD6_2: D6.2 R6.1
NetD7_2: D7.2 R10.1
NetD8_2: D8.2 R9.1
NetD9_2: D9.2 R11.1
NetD10_2: D10.2 R12.1
NetD11_2: D11.2 R13.1
NetD12_2: D12.2 R14.1
NetDS1_1: DS1.1 R22.1
NetJ1_1: J1.1 J1.2 J1.3 J1.4 J1.5 J1.6 R18.2
NetR15_2: R15.2 U1.46
NetR16_2: R16.2 U1.47
NetR24_1: R24.1 U6.4
NetR25_1: R25.1 U6.6
NetR31_2: R31.2 U6.1
PWM_IN: R23.2 U1.36
PWM_OUT: C22.1 R23.1 U6.3
QSPI_CSN: R19.1 R20.1 U1.56 U2.1
QSPI_SCLK: U1.52 U2.6
QSPI_SD0: U1.53 U2.5
QSPI_SD1: U1.55 U2.2
QSPI_SD2: U1.54 U2.3
QSPI_SD3: U1.51 U2.7
RUN: U1.26
SBU1: J1.A8
SBU2: J1.B8
SCL: Q1.3 R27.1 U1.3
SCL_1V8: Q1.2 R29.1 U4.23
SDA: Q2.3 R28.1 U1.2
SDA_1V8: Q2.2 R30.1 U4.24
SWCLK: U1.24
SWD: U1.25
Touch_in: R24.2 U1.34
USB_D_N: J1.A7 J1.B7 R16.1
USB_D_P: J1.A6 J1.B6 R15.1
XIN: C13.2 U1.20 Y1.1
XOUT: R17.2 U1.21
pads on no net: J1. J1.A1/B12 J1.A12/B1 U1.4 U1.18 U1.19 U1.27 U1.28 U1.29 U1.30 U1.31 U1.37 U1.38 U1.39 U1.40 U1.41 U2.9 U4.1 U4.2 U4.3 U4.4 U4.5 U4.6 U4.7 U4.11 U4.14 U4.15 U4.16 U4.17 U4.19 U4.20 U4.21 U4.25 U5.4

## Silkscreen, mask and mechanical layers (free items; w line width, h text height)
Mechanical 1:
  circle w0.254: c44,33.2 r10.312
  lines w0.254: 36.7,40.5 51.3,25.9 ; 64,54.5 85.6,54.5 ; 33.7,33.2 33.7,29 36.8,25.9 ; 33.7,33.2 33.7,37.484 36.708,40.492 39.716,43.5 44,43.5 ; 33.7,33.2 44,33.2 ; 36.8,25.9 51.3,40.4 ; 36.8,25.9 39.8,22.9 44,22.9 ; 44,22.9 48.284,22.9 51.292,25.908 51.308,25.908 54.312,28.912 54.312,33.2 ; 44,22.9 44,33.2 ; 44,33.2 54.312,33.2 ; 44,33.2 44.1,33.2 51.3,40.4 ; 44,33.2 44,43.5 ; 44,33.2 51.3,25.9 ; 44,33.2 44,33.2 ; 44,43.5 48.2,43.5 51.3,40.4 ; 51.3,25.9 51.3,25.9 ; 51.3,40.4 54.312,37.388 54.312,33.2 ; 51.3,40.4 51.3,40.4 ; 85.6,54.5 0,54.5 0,0 85.6,0 85.6,54.5